# EAGLE board Breakout (EAGLE 9.4.2)
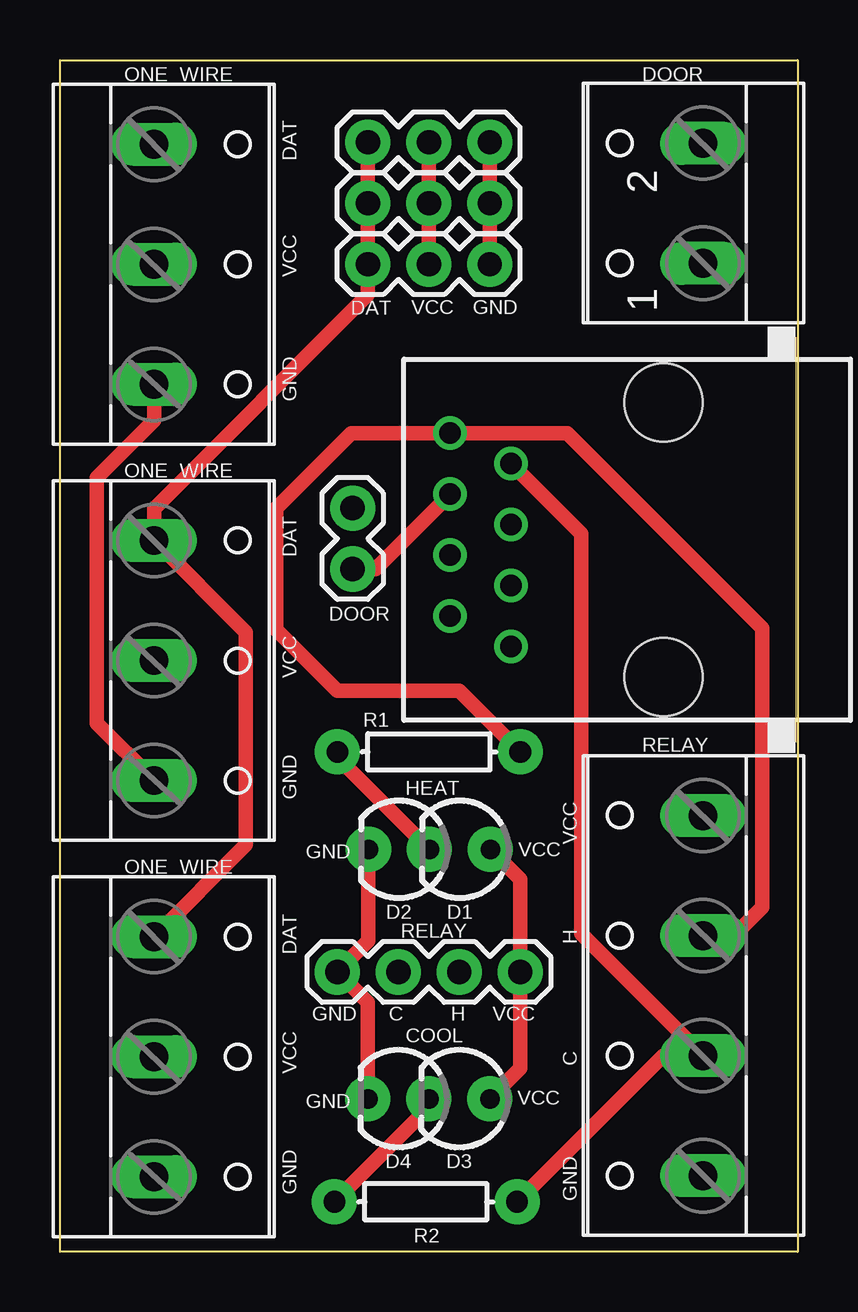
[diagram p0: board, top side]
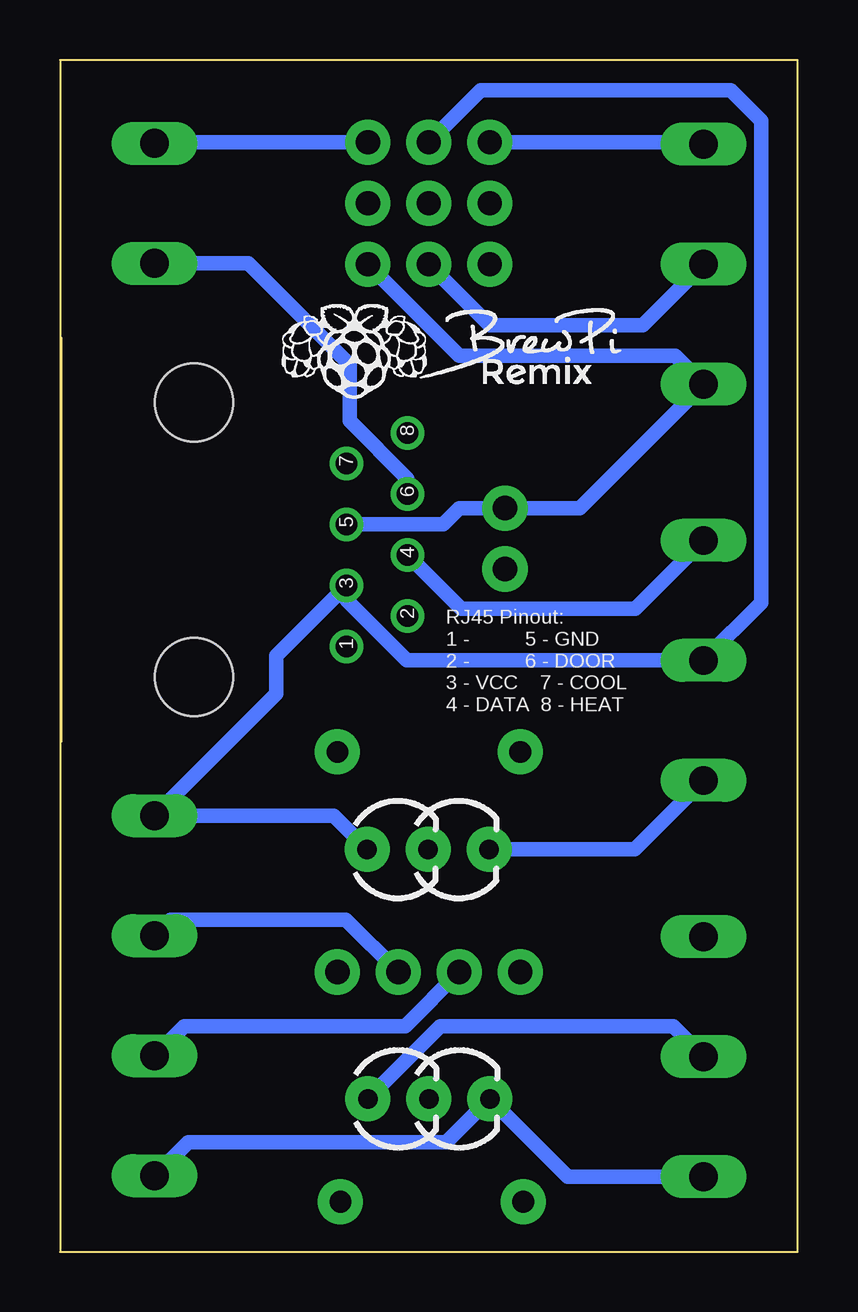
[diagram p1: board, bottom side, seen from below]

Size 30.73 x 49.66 mm. Coordinates in mm from the lower left corner, seen from the top.
Outline: 30.73,0 0,0 0,49.66 30.73,49.66 30.73,0
Copper layers (1*16): Top 0.035559375mm / dielectric 1.6mm / Bottom 0.035559375mm
Design rules "oshpark-2layer *": minimum track width 6mil, minimum drill 10mil, track to track 8mil, track to pad 8mil, pad to pad 8mil, via to via 8mil, smd to smd 8mil, copper to edge 15mil, drill to drill 6mil, minimum pad ring 5mil, minimum via ring 5mil, stop-mask expansion 2.5mil, vias tented up to drill 0mil, thermal gap 10mil

## Footprints (pad centres in the part's own frame; a part is rotated, then mirrored left to right if it is on the bottom)
LED_3MM = drill 0.813 pad 1.88: A -1.27,0; K 1.27,0
1X02 = drill 1.016 pad 1.88: 1 0,0; 2 2.54,0
1X03 = drill 1.016 pad 1.88: 1 0,0; 2 2.54,0; 3 5.08,0
AXIAL-0.3 = drill 0.9 pad 1.88: P$1 -3.81,0; P$2 3.81,0
1X04 = drill 1.016 pad 1.88: 1 0,0; 2 2.54,0; 3 5.08,0; 4 7.62,0
W237-4 = drill 1.194 long: 1 -7.5,-1.27; 2 -2.5,-1.27; 3 2.5,-1.27; 4 7.5,-1.27
RJ45-NO-SHIELD = drill 0.9 pad 1.4: 1 -4.445,6.35; 2 -3.175,8.89; 3 -1.905,6.35; 4 -0.635,8.89; 5 0.635,6.35; 6 1.905,8.89; 7 3.175,6.35; 8 4.445,8.89 | hole 3.251: -5.715,0; 5.715,0
W237-102 = drill 1.194 long: 1 -2.5,-1.27; 2 2.5,-1.27
W237-103 = drill 1.194 long: 1 -5,-1.29; 2 0,-1.29; 3 5,-1.29

## Placement (x,y rotation side)
D1  HINV  [LED_3MM]  16.66,16.76 180 top
D2  HNON  [LED_3MM]  14.12,16.76 180 top
D3  CINV  [LED_3MM]  16.64,6.38 180 top
D4  CNON  [LED_3MM]  14.1,6.38 180 top
DOOR  2-PIN  [1X02]  12.19,30.99 270 top
ONE_WIRE1  3-PIN  [1X03]  17.91,46.23 180 top
ONE_WIRE2  3-PIN  [1X03]  17.91,43.69 180 top
ONE_WIRE3  3-PIN  [1X03]  17.91,41.15 180 top
R1  220Ω  [AXIAL-0.3]  15.37,20.83 180 top
R2  220Ω  [AXIAL-0.3]  15.24,2.08 180 top
RELAY  4-PIN  [1X04]  11.56,11.66 0 top
RELAY_TERM  4TERM  [W237-4]  25.53,10.67 90 top
X1  RJ45-8X  [RJ45-NO-SHIELD]  25.15,29.67 90 top
X2  4TERM  [W237-102]  25.53,43.69 90 top
X3  3TERM  [W237-103]  5.21,41.15 270 top
X4  3TERM  [W237-103]  5.21,24.64 270 top
X5  3TERM  [W237-103]  5.21,8.13 270 top

## Library data of the parts
D1-D4 = SparkFun-LED; PROD_ID: DIO-08794
DOOR = SparkFun-Connectors
ONE_WIRE1-ONE_WIRE3 = SparkFun-Connectors; PROD_ID: XXX-00000
R1 R2 = SparkFun-Passives
RELAY = SparkFun-Connectors; PROD_ID: CONN-09696
RELAY_TERM = con-wago-500; OC_FARNELL: unknown; OC_NEWARK: unknown
X1 = con-tycoelectronics; MPN: RJ45-8X; OC_FARNELL: unknown; OC_NEWARK: 16R6101
X2 = con-wago-500; MPN: 237-102; OC_FARNELL: unknown; OC_NEWARK: 70K9898
X3-X5 = con-wago-500; MPN: 237-103; OC_FARNELL: unknown; OC_NEWARK: 18M7116

## Nets
COOL: R2.P$1 RELAY.2 RELAY_TERM.2 X1.7
DATA: ONE_WIRE1.3 ONE_WIRE2.3 ONE_WIRE3.3 X1.4 X3.1 X4.1 X5.1
DOOR: DOOR.2 X1.6 X2.1
GND: D2.K D4.K DOOR.1 ONE_WIRE1.1 ONE_WIRE2.1 ONE_WIRE3.1 RELAY.1 RELAY_TERM.1 X1.5 X2.2 X3.3 X4.3 X5.3
HEAT: R1.P$1 RELAY.3 RELAY_TERM.3 X1.8
N$1: D1.K D2.A R1.P$2
N$2: D3.K D4.A R2.P$2
VCC: D1.A D3.A ONE_WIRE1.2 ONE_WIRE2.2 ONE_WIRE3.2 RELAY.4 RELAY_TERM.4 X1.3 X3.2 X4.2 X5.2

## Tracks (layer width: path | path; a pad name or v marks a point on that pad's centre or on a via)
COOL
  Top 0.61: X1.7 21.72,29.92 21.72,13.25 RELAY_TERM.2 25.13,8.17 R2.P$1
  Bottom 0.61: RELAY.2 16.36,9.4 25.57,9.4 RELAY_TERM.2
DATA
  Top 0.61: ONE_WIRE1.3 ONE_WIRE2.3 ONE_WIRE3.3 12.83,39.88 3.92,30.97 X4.1 7.75,25.81 7.75,16.96 X5.1
  Bottom 0.61: X1.4 14.02,26.8 6.76,26.8 X4.1 | X3.1 4,46.23 ONE_WIRE1.3
DOOR
  Top 0.61: X1.6 13.13,28.45 DOOR.2
  Bottom 0.61: X1.6 16.26,32.21 18.67,34.62 18.67,36.96 22.9,41.19 X2.1
GND
  Top 0.61: ONE_WIRE3.1 ONE_WIRE2.1 ONE_WIRE1.1 | D2.K 12.85,12.95 RELAY.1 12.83,10.39 D4.K | X3.3 3.92,34.65 1.52,32.26 1.52,22.03 X4.3
  Bottom 0.61: ONE_WIRE3.1 14.1,37.34 5.11,37.34 X3.3 9.08,30.99 DOOR.1 14.1,30.99 14.77,30.32 18.78,30.32 X1.5 | ONE_WIRE1.1 26.76,46.23 X2.2 | D2.K 6.79,16.76 X4.3 | RELAY_TERM.1 25.39,4.57 14.63,4.57 D4.K 9.58,3.13 X5.3
HEAT
  Top 0.61: RELAY_TERM.3 28.07,13.17 29.26,14.36 29.26,25.98 21.13,34.11 X1.8 12.14,34.11 9.02,30.99 9.02,25.91 11.56,23.37 16.64,23.37 R1.P$1
  Bottom 0.61: RELAY.3 18.82,13.84 26.12,13.84 RELAY_TERM.3
N$1
  Top 0.61: D2.A 11.56,20.6 R1.P$2
N$2
  Top 0.61: D4.A 15.37,6.02 R2.P$2
VCC
  Top 0.61: ONE_WIRE3.2 ONE_WIRE2.2 ONE_WIRE1.2 | D3.A 19.18,7.64 RELAY.4 19.18,15.52 D1.A
  Bottom 0.61: D3.A 14.88,9.4 5.19,9.4 X5.2 | D1.A 19.34,18.17 RELAY_TERM.4 21.72,23.25 21.72,24.84 X1.3 18.8,27.15 16.28,24.64 X4.2 3.92,24.66 1.52,27.05 1.52,47.12 2.79,48.39 13.21,48.39 ONE_WIRE1.2 | ONE_WIRE3.2 12.83,38.61 6.46,38.61 X3.2

## Text on the board
tNames: ONE_WIRE | DOOR | DAT | VCC | DAT | VCC | GND | GND | ONE_WIRE | DAT | DOOR | VCC | RELAY | GND | HEAT | VCC | GND | VCC | ONE_WIRE | H | DAT | GND | C | H | VCC | COOL | C | VCC | VCC | GND | GND | GND
bNames: 8 | 7 | 6 | 5 | 4 | 3 | 2 | 1 | RJ45 Pinout: / 1 - 5 - GND / 2 - 6 - DOOR / 3 - VCC 7 - COOL / 4 - DATA 8 - HEAT